# Altium PCB QR_Scanning_V1_STM32.PcbDoc (part 2 of 2)
Units mm, origin at the board's own origin, x right, y up, seen from the top; angles counter-clockwise.
Board outline 129.98 x 102.14 mm, 2 copper layers (Top Layer, Bottom Layer); 184 components, 126 nets, 555 pads, 211 vias.
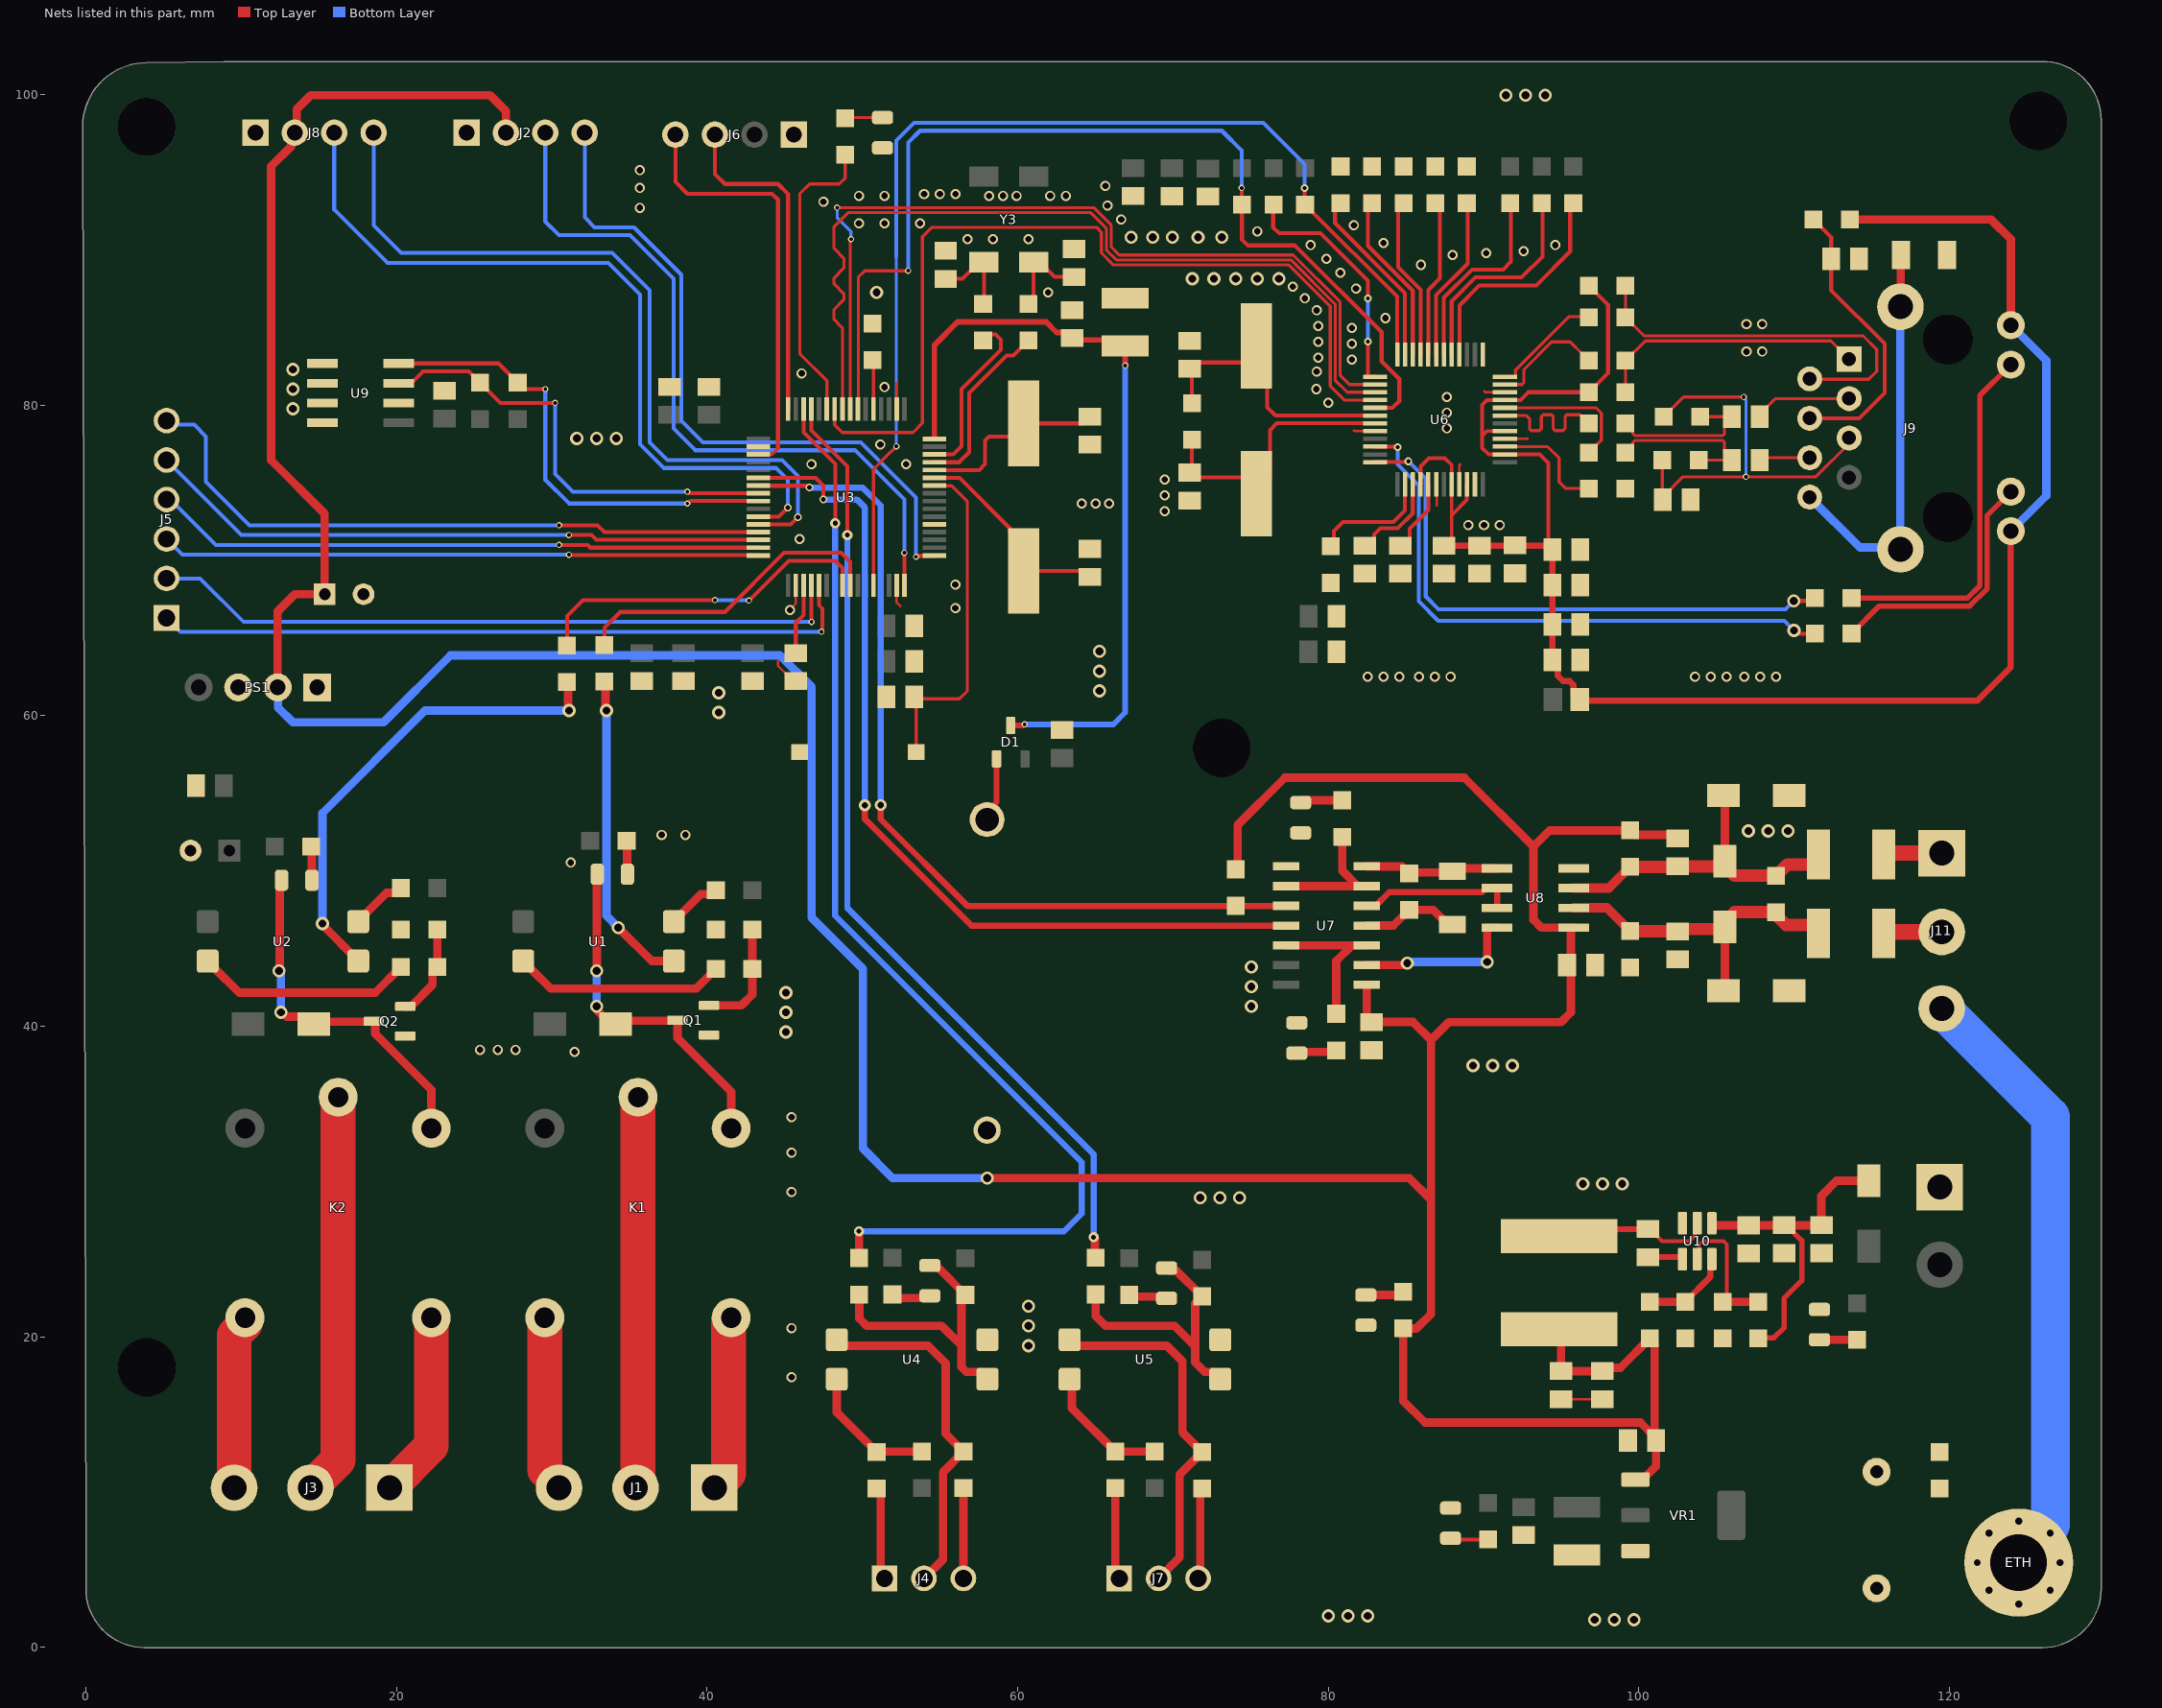
[diagram p2: the nets of this part, all layers, seen from the top]

## Via types
v1: diameter 0.65, hole 0.411, Top Layer to Bottom Layer, 98 vias
v2: diameter 0.85, hole 0.511, Top Layer to Bottom Layer, 73 vias
v3: diameter 0.4, hole 0.24, Top Layer to Bottom Layer, 23 vias
v4: diameter 0.5, hole 0.254, Top Layer to Bottom Layer, 5 vias
v5: diameter 0.65, hole 0.311, Top Layer to Bottom Layer, 4 vias
v6: diameter 0.5, hole 0.311, Top Layer to Bottom Layer, 4 vias
v7: diameter 0.75, hole 0.411, Top Layer to Bottom Layer, 2 vias
v8: diameter 0.4, hole 0.254, Top Layer to Bottom Layer, 2 vias

## Nets (pads, with @x,y where several pads share a name; then routed paths per layer and width w, separated by ;. In a path a pad name is that pad's centre, name@x,y a point inside that pad or via, vN(x,y) a via of type N, cw(c..) or ccw(c..) an arc to the next point about the centre after c; other vN are vias at no path point) (continued)
+5: C35.1 C36.2 C42.2 C46.2 C47.2 C50.2 C54.P J2.02 J8.02 L1.2 PS1.2 R52.1 R53.2 R58.2 R63.2 U7.14 U8.8 VR1.3 | length 291.1
  Top Layer w0.54: PS1.2@12.359,61.821 12.359,66.715 13.462,67.818 C54.P@15.387,67.818 15.387,73.005 11.938,76.454 11.938,95.377 13.24,96.679 13.24,97.314 J8.02@13.462,97.536 ; J8.02@13.588,97.662 13.588,99.059 14.478,99.949 26.035,99.949 27.051,98.933 J2.02@27.051,97.536 ; v2(58.039,30.226) 85.217,30.226 86.614,28.829 ; R53.2@74.041,50.102 74.168,50.229 74.168,52.959 77.216,56.007 88.773,56.007 93.218,51.562 ; U7.14@82.474,42.672 82.474,40.575 C42.2@82.779,40.27 ; C42.2@82.804,40.27 85.46,40.27 86.614,39.116 ; L1.2@94.869,20.495 94.996,20.368 C47.2@94.996,17.791 C46.2@97.595,17.791 ; C46.2@97.584,17.78 C46.2@97.595,17.791 ; C46.2@97.663,17.791 C46.2@97.595,17.791 ; VR1.3@99.785,10.809 100.24,10.809 101.103,11.672 C50.2@101.103,13.335 ; C36.2@102.489,52.092 102.257,52.324 99.727,52.324 R52.1@99.441,52.61 94.266,52.61 93.218,51.562 ; 86.614,28.829 86.614,21.463 85.693,20.542 R63.2@84.836,20.542 84.836,15.875 86.233,14.478 100.11,14.478 C50.2@101.016,13.572 ; 86.614,28.829 86.614,39.116 ; 86.614,39.116 87.757,40.259 94.996,40.259 95.631,40.894 95.631,43.688 C35.1@95.377,43.942 95.631,44.196 95.631,46.177 U8.8@95.809,46.355 93.726,46.355 93.218,46.863 93.218,51.562 ; C46.2@97.595,17.791 97.812,18.008 98.812,18.008 R58.2@100.711,19.907 101.016,19.602 C50.2@101.016,13.572 ; C50.2@101.016,13.572 101.103,13.485 C50.2@101.103,13.335 ; C50.2@101.016,13.572 101.016,13.422 C50.2@101.103,13.335
  Bottom Layer w0.54: PS1.2@12.359,61.821 12.387,61.793 12.387,60.511 13.335,59.563 19.177,59.563 23.495,63.881 44.704,63.881 46.736,61.849 46.736,46.99 50.038,43.688 50.038,32.131 51.943,30.226 v2(58.039,30.226)
+12: C44.2 C48.2 C49.2 D4.C R59.1 U10.3 | length 22.1
  Top Layer w0.34: R59.1@107.696,19.907 107.725,19.936 108.709,19.936 109.347,20.574 109.347,22.479 110.49,23.622 110.49,26.196 109.497,27.189 C44.2@109.347,27.189
  Top Layer w0.54: U10.3@104.709,27.317 104.709,27.203 104.734,27.178 C48.2@107.061,27.178 107.067,27.184 109.347,27.184 111.755,27.184 C49.2@111.76,27.189 111.76,29.083 112.732,30.055 D4.C@114.808,30.055
ACTLED: R47.1 U6.27 | length 38.3
  Top Layer w0.254: U6.27@83.018,77.32 83.031,77.307 84.465,77.307 v4(84.48,77.292) ; v2(109.994,65.481) 110.155,65.481 110.358,65.278 R47.1@111.347,65.278
  Bottom Layer w0.254: v4(84.48,77.292) 84.48,76.171 85.827,74.825 85.827,67.361 87.085,66.103 109.372,66.103 v2(109.994,65.481)
AVDD: C19.2 C20.2 C21.2 C22.2 C23.2 C24.2 C25.2 FB1.2 J9.9 J9.12 R28.2 R29.2 R30.2 U6.4 U6.8 U6.11 U6.15 U6.17 U6.21 | length 127.2
  Top Layer w0.24: U6.21@85.948,74.89 85.968,74.91 85.968,76.062 86.487,76.581 87.503,76.581 87.948,76.136 U6.17@87.948,74.89 87.948,72.898 ; C19.2@87.452,70.942 87.493,70.942 87.948,71.397 87.948,72.898 ; U6.15@88.968,74.91 88.928,74.87 88.928,73.878 87.948,72.898 ; U6.8@91.378,78.32 90.209,78.32 89.916,78.027 ; U6.4@91.378,80.32 90.226,80.32 89.916,80.01 89.916,78.027 ; C25.2@94.172,70.942 94.172,76.262 93.614,76.82 90.325,76.82 89.916,77.23 89.916,78.027
  Top Layer w0.254: U6.4@91.378,80.32 92.385,80.32 92.888,80.823 R29.2@96.793,80.823 98.019,82.049 98.019,86.455 R28.2@96.793,87.681
  Top Layer w0.4: C19.2@87.493,70.942 C20.2@89.738,70.942 92.024,70.942 C25.2@94.172,70.942 ; C25.2@94.426,70.688 C24.2@94.426,68.402 C23.2@94.426,65.862 C22.2@94.426,63.576 94.771,63.232 94.771,62.572 95.118,62.225 95.535,62.225 95.786,61.974 95.786,61.436 96.262,60.96 121.793,60.96 123.952,63.119 J9.12@123.952,71.882
  Top Layer w0.54: R30.2@113.602,91.948 122.682,91.948 123.952,90.678 J9.9@123.952,85.142
  Bottom Layer w0.54: J9.12@123.952,71.882 126.238,74.168 126.238,82.856 J9.9@123.952,85.142
Cry_IN: R3.1 U3.3 | length 11.3
  Top Layer w0.254: U3.3@54.641,76.816 55.861,76.816 56.388,77.343 56.388,81.026 58.928,83.566 58.928,84.201 58.592,84.537 58.153,84.537 R3.1@57.785,84.169
Cry_OUT: R7.1 U3.4 | length 11.5
  Top Layer w0.254: U3.4@54.641,76.316 56.25,76.316 56.896,76.962 56.896,80.772 59.309,83.185 59.722,83.185 R7.1@60.706,84.169
DE/RE: U7.10 U8.2 U8.3 | length 10.2
  Top Layer w0.4: U7.10@82.474,47.752 83.051,47.752 83.94,48.641 89.91,48.641 90.164,48.895 U8.3@90.881,48.895 90.881,48.641 U8.2@90.881,47.625
DI: D16.C R55.2 U7.8 U8.4 | length 8.7
  Top Layer w0.54: U7.8@82.474,50.292 84.773,50.292 R55.2@85.217,49.848 85.276,49.907 87.953,49.907 D16.C@88.011,49.965 88.208,50.162 90.878,50.162 U8.4@90.881,50.165
DI_TX1: R53.1 U3.42 U7.5 | length 56.4
  Top Layer w0.254: U3.42@43.301,74.803 46.425,74.803 46.542,74.685 v6(46.609,74.685)
  Top Layer w0.4: v7(51.183,54.237) 51.183,53.338 56.769,47.752 R53.1@74.041,47.752 U7.5@76.711,47.752
  Bottom Layer w0.4: v6(46.609,74.685) 50.029,74.685 51.183,73.531 v7(51.183,54.237)
ERTH: C53.N C55.1 J4.3 J7.3 PS1.3 Q1.2 Q2.2 R6.1 R13.1 R66.1 R68.1 | length 11.7
  Top Layer w0.54: J4.3@56.515,4.445 R66.1@56.515,10.255 ; J7.3@71.628,4.445 71.755,4.572 71.755,10.096 R68.1@71.882,10.223
  other v1: 45.454,17.391 45.454,20.566 45.454,29.329 45.454,31.869 45.454,34.155 31.484,38.346 25.4,38.481 26.543,38.481 27.686,38.481 31.23,50.538 37.084,52.324 38.608,52.324
  other v2: 45.085,39.624 45.085,40.894 45.085,42.164
GND: BT1.NEG C1.1 C2.1 C3.2 C4.2 C5.1 C6.1 C7.1 C8.1 C9.1 C10.1 C11.1 C12.1 C13.1 C14.2 C15.2 C16.1 C17.1 C18.1 C19.1 C20.1 C21.1 C22.1 C23.1 C24.1 C25.1 C26.1 C29.1 C30.1 C31.1 C32.2 C33.1 C34.2 C35.2 C37.2 C38.2 C39.1 C40.1 C41.1 C42.1 C43.1 C44.1 C46.1 C47.1 C48.1 C49.1 C50.1 C51.2 C52.1 C54.N D5.C D10.C D11.C D12.C D13.2 D15.1 D17.C D18.C J2.01 J6.01 J8.01 J12.1 PS1.1 R14.1 R27.1 R38.1 R39.2 R40.2 R41.2 R44.2 R45.2 R46.2 R56.1 R60.1 R61.1 S2.1 U3.12 U3.18 U3.31 U3.47 U3.63 U4.3 U5.3 U6.3 U6.9 U6.14 U6.16 U6.19 U6.29 U6.48 U7.7 U8.5 U9.1 U9.2 U9.3 U9.4 U9.7 U10.1 VR1.1 | length 16.3
  Top Layer w0.154: 44.577,63.5 44.577,63.212 45.57,62.219 C13.1@45.72,62.219 ; v1(45.339,66.802) 45.339,66.824 45.721,67.206 U3.31@45.721,68.396 ; 52.197,81.407 52.221,81.383 U3.63@52.221,79.736 ; U3.18@52.221,68.396 52.221,67.286 52.451,67.056 ; 81.661,78.359 81.7,78.32 U6.29@83.018,78.32 ; U6.19@86.948,74.89 86.995,74.843 86.995,73.533 ; U6.16@88.448,74.89 88.448,76.129 88.519,76.2 ; 90.043,80.899 90.122,80.82 U6.3@91.378,80.82 ; U6.9@91.378,77.82 92.806,77.82 92.837,77.851 ; C47.1@94.996,15.991 C46.1@97.663,15.991
  other v1: 82.542,62.496 83.558,62.496 84.574,62.496 85.844,62.496 86.86,62.496 87.876,62.496 103.624,62.496 104.64,62.496 105.656,62.496 106.799,62.496 107.815,62.496 108.831,62.496 55.995,66.921 55.995,68.445 45.962,71.366 89.019,72.275 90.035,72.275 91.051,72.275 69.481,73.16 64.135,73.66 65.024,73.66 65.901,73.652 69.481,74.176 69.481,75.192 46.724,76.192 52.82,76.192 51.169,77.462 87.642,78.494 87.642,79.51 80.01,80.137 87.642,80.526 79.248,81.026 51.435,81.153 46.101,82.042 79.256,82.157 81.522,82.923 79.363,83.05 106.934,83.439 107.95,83.439 81.522,83.939 79.363,84.066 81.522,84.955 79.363,85.082 106.934,85.217 107.95,85.217 83.693,85.598 79.256,86.094 78.486,86.868 61.976,87.249 81.788,87.503 77.724,87.63 80.772,88.519 85.979,89.027 79.883,89.408 88.011,89.662 90.17,89.789 92.583,89.916 78.867,90.297 94.615,90.297 83.566,90.424 56.769,90.678 58.42,90.678 60.706,90.678 75.438,91.186 81.661,91.567 49.784,91.694 51.435,91.694 53.721,91.694 66.675,91.948 35.675,92.702 65.786,92.837 47.498,93.091 49.784,93.472 51.435,93.472 58.174,93.46 59.055,93.472 59.944,93.472 62.103,93.472 63.119,93.472 53.983,93.587 54.999,93.587 56.015,93.587 35.675,93.972 65.659,94.107 35.675,95.115
  other v2: 97.155,1.778 98.425,1.778 99.695,1.778 80.01,2.032 81.28,2.032 82.55,2.032 60.706,19.431 60.706,20.701 60.706,21.971 71.755,28.956 73.025,28.956 74.295,28.956 96.393,29.845 97.663,29.845 98.933,29.845 89.322,37.461 90.592,37.461 91.862,37.461 75.057,41.275 75.057,42.545 75.057,43.815 107.061,52.578 108.331,52.578 109.601,52.578 40.767,60.198 40.767,61.468 65.278,61.595 65.278,62.865 65.278,64.135 31.623,77.851 32.893,77.851 34.163,77.851 13.335,79.756 13.335,81.026 13.335,82.296 50.927,87.249 71.247,88.138 72.644,88.138 74.041,88.138 75.438,88.138 76.835,88.138 67.31,90.805 68.707,90.805 69.977,90.805 71.628,90.805 73.152,90.805 91.44,99.949 92.71,99.949 93.98,99.949
GND_ERTH: C18.2 ETH.1 ETH.2 J11.3 R27.2 | length 36.2
  Bottom Layer w2.5: J11.3@119.507,41.148 126.492,34.163 ETH.1@126.492,7.874
IN1_12V: R17.2 U3.51 | length 75.8
  Top Layer w0.254: U3.51@46.221,79.736 46.221,78.239 48.26,76.2 v5(48.26,72.39)
  Top Layer w0.54: v5(49.784,26.797) 49.796,26.785 49.796,25.086 R17.2@49.807,25.074
  Bottom Layer w0.4: v5(48.26,72.39) 48.26,47.117 64.135,31.242 64.135,27.94 62.992,26.797 v5(49.784,26.797)
IN2_12V: R21.2 U3.52 | length 62.2
  Top Layer w0.254: U3.52@46.721,79.736 46.721,78.374 49.039,76.056 v5(49.039,71.628)
  Top Layer w0.54: v5(64.897,26.416) 64.897,26.386 64.982,26.301 64.982,25.125 R21.2@65.024,25.083
  Bottom Layer w0.4: v5(49.039,71.628) 49.039,47.608 64.897,31.75 v5(64.897,26.416)
INT: R25.1 U6.36 | length 15.7
  Top Layer w0.254: R25.1@76.454,92.939 76.454,91.44 76.835,91.059 79.502,91.059 82.55,88.011 v4(82.55,86.868) ; v4(82.55,84.074) 82.55,81.833 82.563,81.82 U6.36@83.018,81.82
  Bottom Layer w0.254: v4(82.55,84.074) v4(82.55,86.868)
LED: R23.2 U3.54 | length 19.6
  Top Layer w0.197: U3.54@47.721,79.736 47.721,81.565 45.974,83.312 45.974,93.599 46.609,94.234 48.514,94.234 48.895,94.615 R23.2@48.895,95.634 ; R23.2@48.895,96.282 R23.2@48.895,96.107 R23.2@48.895,95.634 ; R23.2@48.897,95.633 R23.2@48.895,95.634
LINKLED: R49.1 U6.25 | length 37
  Top Layer w0.254: U6.25@83.018,76.32 84.8,76.32 ; v4(85.166,76.378) 85.11,76.321 84.801,76.321 ; v2(109.982,67.386) 111.169,67.386 R49.1@111.347,67.564 ; 84.8,76.32 84.801,76.321
  Bottom Layer w0.254: v4(85.166,76.378) 86.284,75.26 86.284,67.666 87.097,66.853 109.449,66.853 v2(109.982,67.386)
MISO: U3.56 U6.34 | length 56.7
  Top Layer w0.197: U3.56@48.721,79.736 48.721,84.977 48.629,85.069 48.18,85.518 48.18,86.153 48.815,86.788 48.815,87.169 48.18,87.804 48.18,88.185 48.815,88.82 48.815,89.455 48.18,90.09 48.18,91.487 49.081,92.388 64.711,92.388 65.718,91.381 65.718,89.984 66.362,89.34 77.603,89.34 80.45,86.493 80.45,81.602 81.232,80.82 U6.34@83.018,80.82
MOSI: U3.57 U6.35 | length 56.3
  Top Layer w0.197: v3(48.387,92.71) 64.897,92.71 66.04,91.567 66.04,90.17 66.548,89.662 77.736,89.662 80.772,86.626 80.772,81.915 81.367,81.32 U6.35@83.018,81.32 ; U3.57@49.221,79.736 49.221,90.568 49.276,90.623 v3(49.276,90.678)
  Bottom Layer w0.197: v3(48.387,92.71) 48.387,92.075 49.276,91.186 v3(49.276,90.678)
NetBT1_POS: BT1.POS D1.2 | length 4.2
  Top Layer w0.354: BT1.POS@58.039,53.307 58.039,53.82 58.648,54.429 D1.2@58.648,57.218
NetC4_1: C4.1 R3.2 Y3.1 | length 5.6
  Top Layer w0.254: C4.1@55.372,88.127 56.465,88.127 57.536,89.198 Y3.1@57.836,89.198 57.836,86.57 R3.2@57.785,86.519
NetC13_2: C13.2 U3.30 | length 4.6
  Top Layer w0.254: C13.2@45.72,64.019 45.72,65.973 46.221,66.474 U3.30@46.221,68.396
NetC26_2: C26.2 J9.P4 R30.1 | length 18.6
  Top Layer w0.254: J9.P4@111.002,79.147 114.199,79.147 115.824,80.772 115.824,83.947 112.384,87.387 C26.2@112.384,89.408 112.384,90.816 R30.1@111.252,91.948
NetC29_2: C29.2 U6.22 | length 6
  Top Layer w0.254: C29.2@82.372,70.942 82.522,70.942 82.97,71.39 82.97,71.667 83.363,72.06 84.48,72.06 85.448,73.028 U6.22@85.448,74.89
NetC30_2: C30.2 U6.20 | length 4.8
  Top Layer w0.254: C30.2@84.658,70.942 84.808,70.942 85.256,71.39 85.256,72.048 86.448,73.24 U6.20@86.448,74.89
NetC31_2: C31.2 J9.P5 R42.1 R43.1 | length 27.8
  Top Layer w0.197: C31.2@101.517,74.318 R42.1@101.517,76.454 ; C31.2@101.538,73.914 101.538,74.064 102.851,75.377 v8(106.894,75.377) ; R43.1@101.612,79.248 102.882,80.518 v8(106.756,80.518) ; 106.056,75.377 111.407,75.377 113.542,77.512 J9.P5@113.542,77.877
  Bottom Layer w0.197: v8(106.756,80.518) 106.756,80.463 106.894,80.325 v8(106.894,75.377)
NetC36_1: C36.1 D13.1 D14.2 F1.1 R52.2 R54.2 U8.6 | length 22
  Top Layer w0.54: D13.1@105.454,54.864 105.537,54.781 D14.2@105.537,50.629
  Top Layer w0.6: U8.6@95.809,48.895 98.076,48.895 R52.2@99.441,50.26
  Top Layer w0.8: R52.2@99.441,50.26 C36.1@102.457,50.26 ; C36.1@102.489,50.292 105.2,50.292 D14.2@105.537,50.629 105.537,50.319 106.167,49.689 R54.2@108.839,49.689 109.569,50.419 111.215,50.419 111.565,50.769 F1.1@111.565,51.054
NetC37_1: C37.1 D14.1 D15.2 F2.1 R54.1 R56.2 U8.7 | length 22.1
  Top Layer w0.54: D15.2@105.454,41.91 105.537,41.993 105.537,46.112 D14.1@105.68,46.256
  Top Layer w0.6: U8.7@95.809,47.625 97.949,47.625 R56.2@99.441,46.133
  Top Layer w0.8: R56.2@99.441,46.133 99.452,46.123 102.479,46.123 C37.1@102.489,46.112 102.633,46.256 D14.1@105.394,46.256 ; D14.1@105.537,46.399 105.537,46.709 106.167,47.339 R54.1@108.839,47.339 109.014,47.164 109.014,46.983 109.483,46.514 111.215,46.514 111.565,46.164 F2.1@111.565,45.974
NetC38_1: C38.1 R7.2 Y3.4 | length 5.8
  Top Layer w0.254: R7.2@60.706,86.519 61.036,86.849 Y3.4@61.036,89.198 61.559,88.675 61.947,88.675 62.379,88.243 C38.1@63.627,88.243
NetC45_1: C45.1 U10.6 | length 2.3
  Top Layer w0.35: C45.1@100.584,25.135 102.689,25.135 102.809,25.015 U10.6@102.809,25.007
NetC45_2: C45.2 L1.1 U10.2 | length 10.2
  Top Layer w0.25: C45.2@100.734,26.935 101.507,26.162 103.251,26.162 103.589,26.5 103.589,27.147 U10.2@103.759,27.317
  Top Layer w0.35: L1.1@94.869,26.495 95.309,26.935 C45.2@100.584,26.935 C45.2@100.734,26.935
NetD2_A: D2.A R2.1 | length 2.2
  Top Layer w0.54: R2.1@34.83,51.943 34.857,51.916 34.857,49.811 D2.A@34.884,49.784
NetD2_C: D2.C D3.A K1.COIL2 Q1.3 | length 22.8
  Top Layer w0.54: v2(32.893,41.275) 32.952,41.216 32.952,40.989 33.809,40.132 D3.A@34.119,40.132 34.348,40.361 38.076,40.361 Q1.3@38.101,40.386 38.101,39.242 41.56,35.783 K1.COIL2@41.56,33.432 ; v2(32.893,43.561) 32.914,43.582 32.914,49.764 D2.C@32.934,49.784
  Bottom Layer w0.54: v2(32.893,41.275) v2(32.893,43.561)
NetD5_A: D5.A R62.1 | length 2.4
  Top Layer w0.54: D5.A@111.633,19.812 R62.1@114.046,19.812
NetD6_A: D6.A R10.1 | length 2.2
  Top Layer w0.54: R10.1@14.51,51.562 14.564,51.508 D6.A@14.564,49.403
NetD6_C: D6.C D7.A K2.COIL2 Q2.3 | length 23
  Top Layer w0.54: v2(12.446,43.561) 12.487,43.602 12.487,49.616 D6.C@12.528,49.657 ; v2(12.573,40.894) 12.657,40.894 12.939,40.612 14.208,40.612 D7.A@14.688,40.132 ; D7.A@15.323,40.132 15.486,40.295 18.519,40.295 Q2.3@18.544,40.32 18.61,40.32 18.635,40.295 18.635,39.531 22.256,35.91 K2.COIL2@22.256,33.432
  Bottom Layer w0.54: v2(12.446,43.561) 12.446,43.477 12.573,43.35 v2(12.573,40.894)
NetD8_A: D8.A R15.1 | length 2.5
  Top Layer w0.54: R15.1@51.943,22.733 52.248,22.491 52.415,22.491 53.946,22.514 D8.A@54.356,22.52
NetD8_C: D8.C R16.2 R17.1 U4.4 | length 18.7
  Top Layer w0.54: R17.1@49.6,22.517 R17.1@49.807,22.724 ; R17.1@49.807,22.517 49.807,21.186 50.292,20.701 55.118,20.701 56.388,19.431 ; D8.C@54.356,24.638 54.606,24.638 D8.C@54.766,24.478 ; D8.C@54.766,24.437 54.906,24.437 R16.2@56.642,22.701 ; R16.2@56.706,22.638 56.388,22.32 56.388,19.431 ; U4.4@58.063,17.272 58.063,17.302 57.628,17.737 56.704,17.737 56.388,18.053 56.388,19.431
NetD9_A: D9.A R19.1 | length 2.5
  Top Layer w0.54: R19.1@67.183,22.701 67.294,22.59 69.485,22.59 D9.A@69.596,22.479
NetD9_C: D9.C R20.2 R21.1 U5.4 | length 18.1
  Top Layer w0.54: R21.1@65.024,22.733 65.024,21.336 65.659,20.701 70.104,20.701 71.384,19.422 ; D9.C@69.596,24.429 69.756,24.269 70.219,24.269 R20.2@71.882,22.606 71.438,22.162 71.438,19.422 71.438,18.352 72.052,17.737 72.614,17.737 73.049,17.302 U5.4@73.049,17.272
NetD10_A: D10.A R23.1 | length 2.4
  Top Layer w0.197: R23.1@48.895,98.457 48.949,98.511 D10.A@51.308,98.511
NetD11_A: D11.A R50.1 | length 2.7
  Top Layer w0.54: D11.A@78.232,54.442 78.337,54.547 R50.1@80.899,54.547
NetD12_A: D12.A R51.1 | length 2.7
  Top Layer w0.54: D12.A@77.871,38.354 R51.1@80.538,38.354
NetD16_A: D16.A R55.1 U7.11 | length 6.3
  Top Layer w0.54: U7.11@82.474,46.482 84.201,46.482 R55.1@85.217,47.498 86.758,47.498 87.701,46.555 D16.A@88.011,46.555
NetD17_A: D17.A R63.1 | length 2.5
  Top Layer w0.54: D17.A@82.423,22.692 84.636,22.692 R63.1@84.836,22.892
NetD18_A: D18.A R64.1 | length 2.4
  Top Layer w0.254: D18.A@87.877,6.953 R64.1@90.297,6.953
NetF1_2: F1.2 J11.1 | length 3.8
  Top Layer w1: F1.2@115.765,51.054 115.859,51.148 J11.1@119.507,51.148
NetF2_2: F2.2 J11.2 | length 3.8
  Top Layer w1: F2.2@115.765,45.974 115.859,46.068 J11.2@119.507,46.068
NetJ1_1: J1.1 K1.NO | length 11.2
  Top Layer w2.25: J1.1@40.48,10.287 41.402,11.209 K1.NO@41.402,21.074
NetJ1_2: J1.2 K1.COM | length 25.2
  Top Layer w2.25: J1.2@35.4,10.287 35.4,10.49 35.56,10.65 K1.COM@35.56,35.432
NetJ1_3: J1.3 K1.NC | length 11.3
  Top Layer w2.25: K1.NC@29.56,21.232 29.56,11.41 30.48,10.49 J1.3@30.48,10.287
NetJ3_1: J3.1 K2.NO | length 12.1
  Top Layer w2.25: J3.1@19.558,10.287 22.256,12.985 K2.NO@22.256,21.232
NetJ3_2: J3.2 K2.COM | length 25.9
  Top Layer w2.25: J3.2@14.478,10.287 16.256,12.065 K2.COM@16.256,35.432
NetJ3_3: J3.3 K2.NC | length 11.4
  Top Layer w2.25: J3.3@9.652,10.193 J3.3@9.558,10.287 9.558,20.128 10.256,20.826 K2.NC@10.256,21.232
NetJ4_1: J4.1 R18.1 | length 6
  Top Layer w0.54: R18.1@50.927,10.223 51.181,9.969 51.181,4.699 J4.1@51.435,4.445
NetJ4_2: J4.2 R66.2 U4.2 | length 23
  Top Layer w0.54: U4.2@48.363,19.812 48.744,19.431 54.229,19.431 55.372,18.288 55.372,13.748 R66.2@56.515,12.605 55.199,11.289 55.199,5.669 J4.2@53.975,4.445
NetJ7_1: J7.1 R22.1 | length 5.9
  Top Layer w0.54: R22.1@66.294,10.255 66.294,4.699 J7.1@66.548,4.445
NetJ7_2: J7.2 R68.2 U5.2 | length 23.5
  Top Layer w0.54: U5.2@63.349,19.812 63.73,19.431 69.596,19.431 70.612,18.415 70.612,13.843 R68.2@71.882,12.573 70.439,11.13 70.439,5.796 J7.2@69.088,4.445
NetJ9_10: J9.10 R49.2 | length 23.7
  Top Layer w0.34: R49.2@113.697,67.564 121.158,67.564 121.963,68.369 121.963,80.613 J9.10@123.952,82.602
NetJ9_11: J9.11 R47.2 | length 16.8
  Top Layer w0.34: R47.2@113.697,65.278 115.475,67.056 121.308,67.056 122.428,68.176 122.428,72.898 J9.11@123.952,74.422
NetQ1_1: Q1.1 R5.2 R6.2 | length 7.3
  Top Layer w0.54: Q1.1@40.131,41.336 42.225,41.336 42.926,42.037 R5.2@42.926,43.688 R6.2@42.926,46.228
NetQ2_1: Q2.1 R12.2 R13.2 | length 6
  Top Layer w0.54: Q2.1@20.574,41.27 20.939,41.27 22.333,42.664 22.333,43.51 R12.2@22.638,43.815 R13.2@22.638,46.228
NetR1_1: R1.1 U1.1 | length 3.6
  Top Layer w0.54: U1.1@37.87,46.736 37.87,46.766 39.616,48.512 40.32,48.512 R1.1@40.576,48.768
NetR4_1: R4.1 U1.2 | length 20.7
  Top Layer w0.54: R4.1@33.401,62.198 33.469,62.13 33.469,60.384 v2(33.528,60.325) ; v2(34.29,46.355) 36.449,44.196 U1.2@37.87,44.196
  Bottom Layer w0.54: v2(33.528,60.325) 33.528,47.117 v2(34.29,46.355)
NetR5_1: R5.1 U1.3 | length 13.7
  Top Layer w0.54: U1.3@28.17,44.196 28.17,44.166 28.605,43.731 28.635,43.731 29.948,42.418 39.306,42.418 R5.1@40.576,43.688
NetR9_1: R9.1 U2.1 | length 3.6
  Top Layer w0.54: U2.1@17.55,46.736 17.55,46.766 19.374,48.59 19.983,48.59 R9.1@20.288,48.895
NetR11_1: R11.1 U2.2 | length 31
  Top Layer w0.54: v2(15.24,46.609) 15.24,46.536 17.55,44.226 U2.2@17.55,44.196 ; R11.1@30.988,62.166 31.056,62.098 31.056,60.384 v2(31.115,60.325)
  Bottom Layer w0.54: v2(15.24,46.609) 15.24,53.721 21.844,60.325 v2(31.115,60.325)
NetR12_1: R12.1 U2.3 | length 14
  Top Layer w0.54: U2.3@7.85,44.196 7.85,44.166 8.285,43.731 8.315,43.731 9.882,42.164 18.637,42.164 R12.1@20.288,43.815
NetR14_2: R14.2 U3.60 | length 3.2
  Top Layer w0.197: R14.2@50.673,82.899 50.721,82.851 U3.60@50.721,79.736
NetR18_2: R18.2 R65.2 U4.1 | length 9
  Top Layer w0.54: U4.1@48.363,17.272 48.363,15.137 R18.2@50.927,12.573 ; R18.2@50.927,12.605 R65.2@54.142,12.605
NetR22_2: R22.2 R67.2 U5.1 | length 8.5
  Top Layer w0.54: U5.1@63.349,17.272 63.5,17.121 63.5,15.399 R22.2@66.294,12.605 R67.2@68.922,12.605
NetR31_2: R31.2 U6.1 | length 7
  Top Layer w0.197: U6.1@91.378,81.82 92.018,81.82 92.06,81.862 92.06,82.237 95.523,85.7 R31.2@96.571,85.7
NetR33_2: R33.2 U6.2 | length 7
  Top Layer w0.197: U6.2@91.378,81.32 92.482,81.32 92.598,81.436 92.598,82.285 94.386,84.074 95.574,84.074 R33.2@96.368,83.28
NetR36_2: R36.2 U6.5 | length 9.2
  Top Layer w0.197: U6.5@91.378,79.82 97.255,79.82 97.592,79.484 97.592,77.735 R36.2@96.793,76.937
NetR37_2: R37.2 U6.6 | length 9.1
  Top Layer w0.197: U6.6@91.378,79.32 92.765,79.32 92.964,79.121 92.964,78.474 93.079,78.359 93.611,78.359 93.726,78.474 93.726,79.26 93.841,79.375 94.373,79.375 94.488,79.26 94.488,78.474 94.603,78.359 95.135,78.359 95.25,78.474 95.25,79.26 95.365,79.375 96.234,79.375 R37.2@96.793,78.816
NetR38_2: R38.2 U6.10 | length 7.4
  Top Layer w0.197: U6.10@91.378,77.32 94.13,77.32 94.869,76.581 94.869,75.057 95.301,74.625 R38.2@96.793,74.625
NetR39_1: R39.1 U6.23 | length 8
  Top Layer w0.254: R39.1@80.366,70.739 80.366,71.882 80.95,72.466 84.201,72.466 84.948,73.213 U6.23@84.948,74.89
NetR40_1: R40.1 U6.38 | length 11.8
  Top Layer w0.254: R40.1@80.797,93.008 80.442,92.653 80.442,91.703 84.948,87.196 U6.38@84.948,83.25
NetR41_1: R41.1 U6.39 | length 11.1
  Top Layer w0.254: R41.1@82.829,93.008 82.55,92.729 82.55,90.246 85.448,87.348 U6.39@85.448,83.25
NetR44_1: R44.1 U6.40 | length 10.5
  Top Layer w0.254: R44.1@84.861,93.008 84.506,92.653 84.506,88.875 85.948,87.432 U6.40@85.948,83.25
NetR45_1: R45.1 U6.41 | length 10.1
  Top Layer w0.254: U6.41@86.448,83.25 86.448,87.406 87.198,88.156 R45.1@87.198,93.008
NetR46_1: R46.1 U6.42 | length 10.5
  Top Layer w0.254: U6.42@86.948,83.25 86.948,87.075 88.976,89.103 R46.1@88.976,92.888
NetR50_2: R50.2 U7.6 U7.9 | length 8.8
  Top Layer w0.54: U7.6@77.292,49.022 U7.9@81.896,49.022 ; R50.2@80.899,52.197 80.899,50.019 U7.9@81.896,49.022 ; U7.9@82.474,49.022 U7.9@81.896,49.022
NetR51_2: R51.2 U7.3 U7.12 | length 10.1
  Top Layer w0.54: U7.3@77.292,45.212 81.534,45.212 ; R51.2@80.518,40.624 R51.2@80.518,40.799 ; R51.2@80.518,40.926 80.518,44.196 81.534,45.212 ; U7.12@82.474,45.212 81.534,45.212
NetR58_1: R58.1 R61.2 U10.4 | length 5.7
  Top Layer w0.4: R61.2@102.997,22.257 104.614,23.874 104.614,24.912 U10.4@104.709,25.007
  Top Layer w0.54: R58.1@100.711,22.257 R61.2@102.997,22.257
NetR59_2: R59.2 R60.2 U10.5 | length 9
  Top Layer w0.24: U10.5@103.759,25.007 103.875,25.123 103.875,25.897 104.14,26.162 105.459,26.162 105.664,25.957 105.664,22.511 R60.2@105.41,22.257
  Top Layer w0.54: R60.2@105.41,22.257 105.664,22.257 R59.2@107.696,22.257
NRST: C12.2 S2.2 U3.7 | length 22.3
  Top Layer w0.197: C12.2@53.451,61.087 C12.2@53.467,61.087 ; S2.2@53.467,57.658 53.467,57.979 C12.2@53.467,61.087 ; C12.2@53.467,61.214 C12.2@53.467,61.087 ; S2.2@53.527,57.979 S2.2@53.848,57.658 ; U3.7@54.635,74.81 U3.7@54.641,74.816 54.655,74.803 55.753,74.803 56.769,73.787 56.769,61.595 56.261,61.087 C12.2@53.467,61.087
OSC_IN: C14.1 U3.5 Y1.2 | length 11
  Top Layer w0.254: U3.5@54.641,75.816 57.528,75.816 57.912,76.2 57.912,77.724 58.166,77.978 Y1.2@59.563,77.978 ; Y1.2@60.401,78.816 64.164,78.816 C14.1@64.516,79.168
OSC_OUT: C15.1 U3.6 Y1.1 | length 10.9
  Top Layer w0.254: U3.6@54.641,75.316 56.256,75.316 59.528,72.044 59.528,71.79 Y1.1@59.563,71.755 ; Y1.1@60.401,69.316 64.226,69.316 C15.1@64.567,68.975
PA2_TX16: J2.04 U3.16 | length 44.8
  Top Layer w0.254: v3(53.467,70.231) 53.507,70.231 53.569,70.293 54.618,70.293 U3.16@54.641,70.316
  Bottom Layer w0.254: J2.04@32.131,97.536 32.131,92.075 32.766,91.44 35.306,91.44 38.354,88.392 38.354,78.994 39.751,77.597 49.911,77.597 53.467,74.041 v3(53.467,70.231)
PA3_RX17: J2.03 U3.17 | length 47.4
  Top Layer w0.254: v3(52.705,70.485) 52.713,70.477 52.713,68.405 U3.17@52.721,68.396
  Bottom Layer w0.254: J2.03@29.591,97.536 29.591,91.821 30.48,90.932 35.052,90.932 37.846,88.138 37.846,78.486 39.243,77.089 49.53,77.089 52.705,73.914 v3(52.705,70.485)
PB2: J5.1 U3.28 | length 45.6
  Top Layer w0.24: U3.28@47.221,68.396 47.221,67.105 47.437,66.889 47.437,65.514 47.371,65.448 v3(47.371,65.405)
  Bottom Layer w0.24: J5.1@5.207,66.294 6.096,65.405 v3(47.371,65.405)
PB10: J5.2 U3.29 | length 45
  Top Layer w0.24: U3.29@46.721,68.396 46.729,68.389 46.729,66.047 v3(46.736,66.04)
  Bottom Layer w0.24: J5.2@5.207,68.834 7.366,68.834 10.16,66.04 v3(46.736,66.04)
PB12: J5.3 U3.33 | length 38.5
  Top Layer w0.254: v3(31.115,70.358) 31.136,70.337 43.28,70.337 U3.33@43.301,70.316
  Bottom Layer w0.254: J5.3@5.207,71.374 6.223,70.358 v3(31.115,70.358)
PB13: J5.4 U3.34 | length 39.4
  Top Layer w0.254: v3(30.48,70.993) 32.318,70.993 32.495,70.816 U3.34@43.301,70.816
  Bottom Layer w0.254: J5.4@5.207,73.914 5.461,73.914 8.382,70.993 v3(30.48,70.993)
PB14: J5.5 U3.35 | length 40.1
  Top Layer w0.254: v3(31.115,71.628) 32.562,71.628 32.874,71.316 U3.35@43.301,71.316
  Bottom Layer w0.254: J5.5@5.207,75.819 5.386,75.998 5.663,75.998 10.033,71.628 v3(31.115,71.628)
PB15: J5.6 U3.36 | length 42.8
  Top Layer w0.254: v3(30.48,72.263) 32.948,72.263 33.395,71.816 U3.36@43.301,71.816
  Bottom Layer w0.254: J5.6@5.207,78.994 5.461,78.74 6.985,78.74 7.747,77.978 7.747,75.057 10.541,72.263 v3(30.48,72.263)
PC6_TX37: J8.04 U3.37 | length 51.1
  Top Layer w0.254: U3.37@43.301,72.316 45.392,72.316 v6(45.847,72.771)
  Bottom Layer w0.254: J8.04@18.542,97.536 18.542,91.567 20.32,89.789 33.909,89.789 36.322,87.376 36.322,77.597 37.465,76.454 44.831,76.454 45.847,75.438 v6(45.847,72.771)
PC7_RX38: J8.03 U3.38 | length 51
  Top Layer w0.254: U3.38@43.301,72.816 44.622,72.816 v6(45.212,73.406)
  Bottom Layer w0.254: J8.03@16.002,97.536 16.002,92.583 19.431,89.154 33.655,89.154 35.687,87.122 35.687,77.47 37.211,75.946 44.45,75.946 45.212,75.184 v6(45.212,73.406)
PMODE0: R32.1 U6.45 | length 15.1
  Top Layer w0.254: U6.45@88.448,83.25 88.448,86.416 89.738,87.706 93.396,87.706 95.58,89.891 R32.1@95.58,93.269
PMODE1: R34.1 U6.44 | length 13.9
  Top Layer w0.254: U6.44@87.948,83.25 87.948,86.678 89.484,88.214 92.456,88.214 93.802,89.56 R34.1@93.802,93.008
PMODE2: R35.1 U6.43 | length 12.6
  Top Layer w0.254: U6.43@87.448,83.25 87.448,86.912 89.258,88.722 91.262,88.722 91.77,89.23 R35.1@91.77,92.888
Relay1: R4.2 U3.24 | length 20.7
  Top Layer w0.254: R4.2@33.401,64.548 33.401,65.659 34.417,66.675 41.148,66.675 44.958,70.485 48.641,70.485 49.221,69.905 U3.24@49.221,68.396
Relay2: R11.2 U3.25 | length 22.4
  Top Layer w0.254: R11.2@30.988,64.516 30.988,66.421 32.004,67.437 v3(40.513,67.437) ; v3(42.702,67.407) 45.272,69.977 48.26,69.977 48.721,69.516 U3.25@48.721,68.396
  Bottom Layer w0.254: v3(40.513,67.437) 40.528,67.422 42.687,67.422 v3(42.702,67.407)
RJ45_N: C28.1 J9.P6 | length 3.3
  Top Layer w0.197: C28.1@107.794,76.454 107.947,76.607 J9.P6@111.002,76.607
RJ45_P: C27.1 J9.P3 | length 6.3
  Top Layer w0.197: C27.1@107.794,79.248 107.794,79.398 108.813,80.417 J9.P3@113.542,80.417
RO: U7.13 U8.1 | length 10.7
  Top Layer w0.54: U7.13@82.474,43.942 84.879,43.942 85.006,44.069 v2(85.09,44.069) ; v2(90.238,44.137) 90.238,46.352 90.241,46.355 U8.1@90.881,46.355
  Bottom Layer w0.54: v2(85.09,44.069) 85.149,44.128 85.369,44.128 85.377,44.137 v2(90.238,44.137)
RO_RX1: U3.43 U7.4 | length 57.6
  Top Layer w0.254: U3.43@43.301,75.316 46.985,75.316 47.498,74.803 v6(47.498,73.914)
  Top Layer w0.4: v7(50.165,54.229) 50.165,53.34 57.023,46.482 U7.4@76.711,46.482
  Bottom Layer w0.4: v6(47.498,73.914) 49.657,73.914 50.181,73.39 50.181,54.245 v7(50.165,54.229)
RST: R26.1 U3.21 U6.37 | length 71.9
  Top Layer w0.197: U3.21@50.721,68.396 50.721,75.867 51.567,76.713 v3(52.197,77.343) ; R26.1@78.486,92.939 R26.1@78.511,92.913
  Top Layer w0.254: R26.1@78.486,92.939 v4(78.486,93.98) ; R26.1@78.74,93.096 78.74,92.685 84.448,86.976 U6.37@84.448,83.25
  Bottom Layer w0.197: v3(52.197,77.343) 52.197,89.535
  Bottom Layer w0.254: 52.197,89.535 52.197,97.028 53.34,98.171 75.819,98.171 78.486,95.504 v4(78.486,93.98)
RX_N: C28.2 R36.1 R42.2 | length 10.3
  Top Layer w0.197: R36.1@99.143,76.937 99.619,77.413 99.619,77.599 99.735,77.714 104.041,77.714 105.402,77.714 105.518,77.599 105.518,76.931 C28.2@105.994,76.454 R42.2@103.867,76.454
RX_P: C27.2 R37.1 R43.2 | length 10.2
  Top Layer w0.197: R37.1@99.143,78.816 99.619,78.34 99.619,78.154 99.735,78.038 104.175,78.038 105.402,78.038 105.518,78.154 105.518,78.771 C27.2@105.994,79.248 R43.2@103.962,79.248
SCL: R57.1 U3.41 U9.6 | length 29.4
  Top Layer w0.254: U9.6@20.168,81.407 20.32,81.559 21.107,81.559 21.717,82.169 24.67,82.169 R57.1@25.4,81.439 26.702,80.137 v3(30.226,80.137) ; v3(38.735,74.422) 38.775,74.422 38.88,74.316 U3.41@43.301,74.316
  Bottom Layer w0.254: v3(30.226,80.137) 30.226,75.565 31.369,74.422 v3(38.735,74.422)
SCS: R24.1 U3.58 U6.32 | length 66.6
  Top Layer w0.197: U3.58@49.708,79.736 49.753,79.781 49.753,88.234 50.165,88.646 v3(52.959,88.646)
  Top Layer w0.254: R24.1@74.422,92.913 v3(74.422,93.98) ; R24.1@74.447,92.913 74.447,90.653 74.825,90.275 77.873,90.275 83.439,84.709 83.439,82.829 84.582,81.686 84.582,80.264 84.139,79.821 U6.32@82.694,79.821
  Bottom Layer w0.254: v3(52.959,88.646) 52.959,96.901 53.721,97.663 73.152,97.663 74.422,96.393 v3(74.422,93.98)
SDA: R8.1 U3.40 U9.5 | length 30.4
  Top Layer w0.254: U9.5@20.168,82.677 26.575,82.677 28.226,81.026 v3(29.591,81.026) ; v3(38.735,73.66) 38.775,73.66 38.931,73.816 U3.40@43.301,73.816
  Bottom Layer w0.254: v3(29.591,81.026) 29.591,75.184 31.115,73.66 v3(38.735,73.66)
SGND: C33.2 J9.P8 J9.S1 J9.S2 | length 26.2
  Top Layer w0.54: J9.S1@116.842,86.327 116.866,86.351 116.866,89.639 C33.2@116.889,89.662
  Bottom Layer w0.54: J9.P8@111.002,74.067 114.243,70.826 116.713,70.826 J9.S2@116.842,70.697 J9.S1@116.842,86.327
SWCLK: J6.03 U3.49 | length 21.6
  Top Layer w0.254: J6.03@40.513,97.409 40.513,94.869 41.148,94.234 44.577,94.234 45.221,93.59 U3.49@45.221,79.736
SWDIO: J6.04 U3.46 | length 27.6
  Top Layer w0.197: U3.46@43.301,76.816 44.177,76.816 44.577,77.216
  Top Layer w0.254: J6.04@37.973,97.409 37.973,94.361 38.735,93.599 44.196,93.599 44.577,93.218 44.577,77.216
SWO/sck1: U3.55 U6.33 | length 57
  Top Layer w0.197: U3.55@48.26,79.775 U3.55@48.221,79.736 48.221,78.728 48.717,78.232 53.272,78.232 53.878,78.838 53.878,90.835 54.483,91.44 65.077,91.44 65.396,91.121 65.396,89.798 66.176,89.018 77.47,89.018 80.128,86.36 80.128,81.215 81.023,80.32 U6.33@83.018,80.32
TX_N: J9.P2 R28.1 R31.1 | length 24.6
  Top Layer w0.197: R28.1@99.143,87.681 R31.1@99.143,85.649 100.337,84.455 106.421,84.455 112.502,84.455 114.439,84.455 115.316,83.578 115.316,82.169 114.808,81.661 J9.P2@111.379,81.661
TX_P: J9.P1 R29.1 R33.1 | length 17.4
  Top Layer w0.197: R29.1@99.143,80.823 R33.1@99.143,82.855 100.419,84.131 106.555,84.131 112.368,84.131 J9.P1@113.542,82.957
VBAT: C2.2 C3.1 D1.3 U3.1 | length 50.7
  Top Layer w0.354: 54.641,77.978 54.641,83.851 56.134,85.344 61.849,85.344 62.517,84.676 63.014,84.676 63.5,84.19 66.543,84.19 C3.1@66.929,83.804 v3(66.929,82.55) ; D1.3@59.563,59.368 60.372,59.368 60.44,59.436 v3(60.452,59.436)
  Bottom Layer w0.354: v3(60.452,59.436) 66.167,59.436 66.929,60.198 v3(66.929,82.55)
XI: C34.1 R48.1 U6.30 Y2.2 | length 18.2
  Top Layer w0.254: C34.1@71.044,75.627 71.222,75.805 R48.1@71.222,77.667 ; C34.1@71.069,75.351 74.514,75.351 Y2.2@75.387,74.478 ; Y2.2@75.387,74.295 Y2.2@75.387,74.478 ; U6.30@83.018,78.82 76.687,78.82 76.249,78.382 76.249,75.339 Y2.2@75.387,74.478
XO: C32.1 R48.2 U6.31 Y2.1 | length 18.6
  Top Layer w0.254: C32.1@71.069,82.739 74.514,82.739 75.387,83.612 Y2.1@75.387,83.795 76.073,83.109 76.073,79.858 76.61,79.32 U6.31@83.018,79.32 ; C32.1@71.095,82.336 71.222,82.209 R48.2@71.222,80.017
pads on no net: H1.1 H2.1 H3.1 H4.1 J9. J9.P7 U3.2 U3.8 U3.9 U3.10 U3.11 U3.14 U3.15 U3.20 U3.22 U3.23 U3.26 U3.27 U3.39 U3.44 U3.45 U3.50 U3.53 U3.59 U3.61 U3.62 U6.7 U6.12 U6.13 U6.18 U6.24 U6.26 U6.46 U6.47 U7.1 U7.2 Y3.2 Y3.3

## Polygon pours and split planes (outlines as drawn)
GND on Top Layer "GND_L01_P001" (solid, pour order 1): 84.281,102.124 80.137,97.981 80.137,92.393 81.788,90.742 81.788,90.615 86.868,85.535 86.868,78.042 84.963,76.137 84.963,75.057 79.756,69.85 79.756,62.611 80.701,61.666 121.612,61.541 129.776,69.705 129.776,98.57 126.222,102.124
GND on Top Layer "GND_L01_P022" (solid, pour order 22): 65.405,95.377 78.867,95.377 79.248,94.996 79.248,90.17 81.407,90.17 85.979,85.598 85.979,78.232 84.709,76.962 78.232,76.962 78.232,72.009 76.2,69.977 69.088,69.977 69.088,84.455 70.612,85.979 70.612,88.392 69.088,89.916 68.834,89.662 66.548,89.662 66.548,91.567 65.405,92.71
GND on Top Layer "GND_L01_P021" (solid, pour order 21): 56.388,35.306 56.388,19.685 57.912,18.161 74.676,18.161 74.676,18.034 77.343,15.367 77.343,0 111.76,0 111.76,7.62 113.157,9.017 116.459,9.017 116.459,10.414 117.856,11.811 120.777,11.811 121.92,12.954 121.92,30.48 63.754,30.48 58.928,35.306 48.895,35.306
GND on Top Layer "GND_L01_P020" (solid, pour order 20): 9.271,102.108 9.271,96.266 10.287,95.25 12.319,95.25 12.954,94.615 12.954,76.708 16.383,73.279 16.383,66.167 13.843,63.627 13.843,60.071 38.608,60.071 43.053,55.626 55.499,55.626 57.531,57.658 64.897,57.658 67.564,60.325 67.564,84.455 69.342,86.233 69.342,89.027 65.151,89.027 63.754,90.424 63.754,102.108
GND_ERTH on Top Layer "GND_ERTH_L01_P017" (solid, pour order 17): 112.522,0 112.522,5.715 114.046,7.239 117.221,7.239 117.221,9.652 118.618,11.049 129.794,11.049 129.794,3.429 126.365,0
ERTH on Top Layer "ERTH_L01_P014" (solid, pour order 14): -0.127,63.5 10.541,63.5 11.176,62.865 11.176,53.086 40.005,53.086 46.228,46.863 46.228,15.875 48.387,13.716 72.644,13.716 74.168,12.192 74.168,0 47.117,0 44.958,2.159 44.958,36.449 43.18,38.227 39.37,38.227 38.227,39.37 33.147,39.37 31.75,37.973 20.574,37.973 18.669,39.878 12.192,39.878 10.16,37.846 -0.127,37.846
GND on Top Layer "GND_L01_P002" (solid, pour order 2): 113.03,53.594 111.601,55.499 77.343,55.499 74.803,52.959 74.803,37.719 75.819,36.703 110.363,36.703 113.03,39.37 113.03,52.959
GND on Bottom Layer "GND_L02_P019" (solid, pour order 19): 111.76,0 111.76,7.62 113.157,9.017 116.459,9.017 116.459,10.414 117.856,11.811 120.777,11.811 121.92,12.954 121.92,31.115 117.221,35.814 117.221,55.499 117.983,56.261 129.794,56.261 129.794,98.552 126.238,102.108 3.556,102.108 -0.254,98.298 -0.127,98.171 -0.127,64.389 12.192,64.389 13.97,62.611 13.97,56.769 16.129,54.61 41.783,54.61 48.514,47.879 48.514,22.225 52.578,18.161 74.549,18.161 77.216,15.494 77.216,0
GND_ERTH on Bottom Layer "GND_ERTH_L02_P018" (solid, pour order 18): 112.522,0 112.522,5.715 114.046,7.239 117.221,7.239 117.221,9.652 118.618,11.049 129.794,11.049 129.794,3.429 126.365,0
ERTH on Bottom Layer "ERTH_L02_P015" (solid, pour order 15): -0.127,63.5 10.541,63.5 11.176,62.865 11.176,53.086 40.005,53.086 46.228,46.863 46.228,15.875 48.387,13.716 72.644,13.716 74.168,12.192 74.168,0 47.117,0 44.958,2.159 44.958,36.449 43.18,38.227 39.37,38.227 38.227,39.37 33.147,39.37 31.75,37.973 20.574,37.973 18.669,39.878 12.192,39.878 10.16,37.846 -0.127,37.846

## Keep-outs
Keep-Out Layer:
  lines w0.54: 125.984,0.254 ccw(c125.984,0.254) 125.984,0.254 ; 125.984,0.254 ccw(c125.984,3.775) 129.505,3.775 129.505,98.333 ccw(c125.984,98.333) 125.984,101.854 8.89,101.854 3.928,101.77 ccw(c3.928,97.909) 0.067,97.909 0.288,5.3 0.288,3.776 ccw(c3.81,3.776) 3.81,0.254 125.984,0.254

## Other copper
Top Layer:
  region net 3V3: 35.624,79.312 34.481,80.455 34.354,80.455 33.211,79.312

## Silkscreen, mask and mechanical layers (free items; w line width, h text height)
Top Overlay:
  text "GND" at 8.382,92.71 h1.24
  text "5V" at 13.208,92.71 h1.24
  text "RX" at 16.002,92.71 h1.24
  text "TX" at 18.923,92.71 h1.24
  text "GND" at 22.606,92.71 h1.24
  text "5V" at 26.67,92.71 h1.24
  text "RX" at 29.464,92.71 h1.24
  text "TX" at 32.258,92.71 h1.24
  text "SWDIO" at 38.989,89.535 h1.24 r90
  text "SWSCK" at 41.656,89.535 h1.24 r90
  text "3V3" at 43.942,89.535 h1.24 r90
  text "GND" at 46.101,89.535 h1.24 r90
  text "QR_Scanning_V1" at 22.638,86.423 h2
  text "PC5" at 7.493,77.724 h1.24
  text "PC4" at 7.366,75.184 h1.24
  text "PB15" at 7.366,72.263 h1.24
  text "PB14" at 7.366,70.104 h1.24
  text "PB13" at 7.366,67.691 h1.24
  text "PB12" at 7.366,65.278 h1.24
  text "RS485" at 122.682,58.166 h1.24
  text "A" at 115.316,53.594 h1.24
  text "B" at 115.316,42.037 h1.24
  text "-V" at 120.777,33.782 h1.52
  text "5V" at 81.915,24.511 h1.52
  text "+V" at 120.777,18.923 h1.52
  text "12V PWR" at 117.983,16.891 h1.52
  text "NC" at 28.575,14.859 h1.52
  text "COM" at 33.528,14.859 h1.52
  text "NO" at 40.132,14.859 h1.52
  text "NC" at 8.382,14.351 h1.52
  text "COM" at 14.732,14.224 h1.52
  text "NO" at 21.209,14.224 h1.52
  text "GND" at 46.736,13.335 h1.24 r90
  text "3V3" at 86.233,11.176 h1.52
  text "COM" at 71.247,6.985 h1.24
  text "12V" at 48.768,6.858 h1.24
  text "COM" at 56.007,6.858 h1.24
  text "12V" at 64.008,6.858 h1.24
  text "NO" at 52.705,6.604 h1.24
  text "NO" at 68.199,6.604 h1.24

## Text inside footprints (layer, text, board x,y; h text height)
BT1: Top Overlay "-" at 58.039,27.781 h1.42; Top Overlay "+" at 58.039,54.781 h1.42; Mechanical 13 "-" at 58.039,27.781 h1.42; Mechanical 13 "+" at 58.039,54.781 h1.42